# EAGLE board display_prog (EAGLE 6.1)
DATE: 01/14
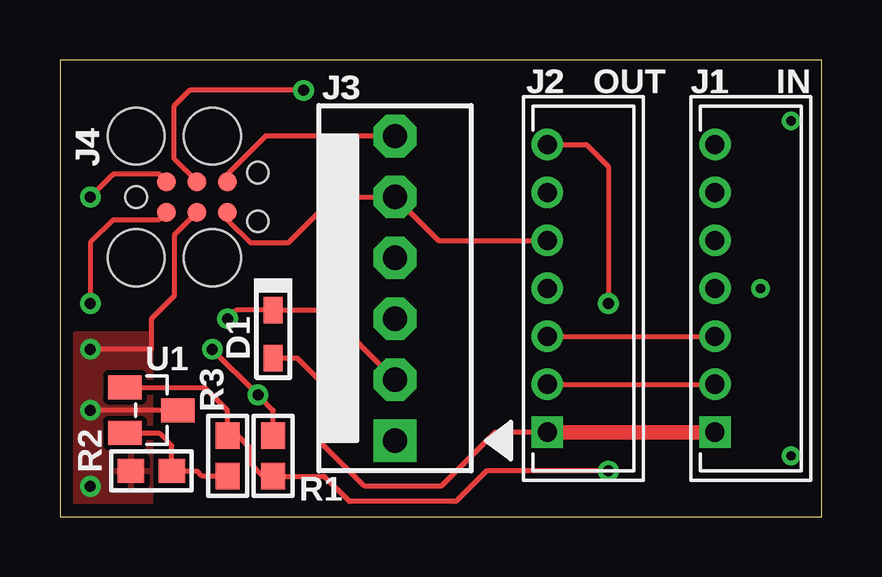
[diagram p0: board, top side]
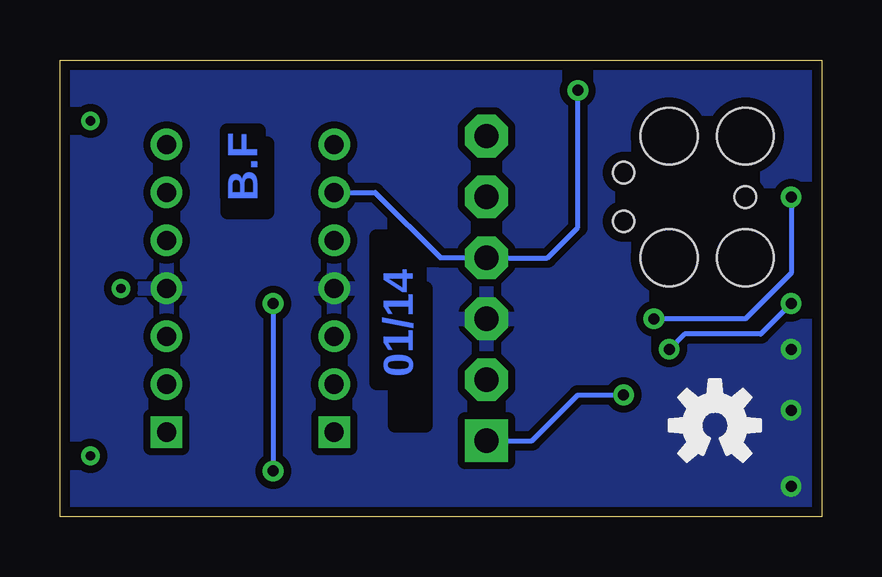
[diagram p1: board, bottom side, seen from below]

Size 31.75 x 19.05 mm. Coordinates in mm from the lower left corner, seen from the top.
Outline: 0,0 31.75,0 31.75,19.05 0,19.05 0,0
Copper layers (1*16): Top 0.035mm / dielectric 1.5mm / Bottom 0.035mm
Design rules: minimum track width 8mil, minimum drill 18mil, track to track 8mil, track to pad 8mil, pad to pad 8mil, via to via 8mil, smd to smd 8mil, copper to edge 16mil, drill to drill 8mil, minimum pad ring 10mil, minimum via ring 8mil, stop-mask expansion 4mil, vias tented up to drill 24mil, thermal gap 10mil
bRestrict: area 23.1,12.7 to 24.8,15.6; area 16.5,3.8 to 17.8,9.5

## Footprints (pad centres in the part's own frame; a part is rotated, then mirrored left to right if it is on the bottom)
DIODE_0603 = smd 1.1 x 0.8: A -1,0; K 1,0
DF3X-7P-2DSA = drill 0.8 square: 1 6,0 | drill 0.8: 2 4,0; 3 2,0; 4 0,0; 5 -2,0; 6 -4,0; 7 -6,0
22-23-2061 = drill 1.016 pad 1.778 square: 1 -6.35,0 | drill 1.016 pad 1.778 octagon: 2 -3.81,0; 3 -1.27,0; 4 1.27,0; 5 3.81,0; 6 6.35,0
TC2030-MCP = smd 0.787 x 0.787: 1 1.27,-0.635; 2 1.27,0.635; 3 2.54,-0.635; 4 2.54,0.635; 5 3.81,-0.635; 6 3.81,0.635 | hole 0.889: 0,0; 5.08,-1.016; 5.08,1.016 | hole 2.375: 0,2.54; 0,-2.54; 3.175,-2.54; 3.175,2.54
SMD_0603 = smd 1.1 x 1: 1 -0.85,0; 2 0.85,0
SOT23 = smd 1 x 1.4: 1 -0.95,-1.1; 2 0.95,-1.1; 3 0,1.1

## Placement (x,y rotation side)
D1  N/A  [DIODE_0603]  8.89,7.62 90 top
J1  SNG-2MM-HEADER-07-V  [DF3X-7P-2DSA]  27.3,9.53 270 top
J2  SNG-2MM-HEADER-07-V  [DF3X-7P-2DSA]  20.32,9.53 270 top
J3  SNG-100-HEADER-06-FL-V  [22-23-2061]  13.97,9.53 90 top
J4  TC2030-MCP  [TC2030-MCP]  3.17,13.34 0 top
R1  270  [SMD_0603]  8.89,2.54 90 top
R2  10k 1%  [SMD_0603]  3.81,1.91 0 top
R3  24k 1%  [SMD_0603]  6.99,2.54 90 top
U1  LM431BCM3  [SOT23]  3.81,4.45 270 top
U$1  [OPENHW_LOGO_150]  4.45,3.81 0 bottom
U$2  [INFO_AUTHOR]  24.13,14.61 270 bottom
U$3  [INFO_DATE]  17.02,5.84 90 bottom

## Library data of the parts
D1 = Passive; DESCRIPTION: {DESCRIPTION} - SMT 0603 - {VALUE}; PACKAGE: SMT 0603; SKU: {VALUE}
J1 J2 = Connectors; DESCRIPTION: {DESCRIPTION} - SMT Vertical; MFG: Hirose Electronic; SKU: DF3X-7P-2DSA
J3 = Connectors; DESCRIPTION: {DESCRIPTION} - Vertical; MFG: Molex; SKU: 22-23-2061
J4 = Connectors; BOM: 0; MFG: Tag-Connect
R1-R3 = Passive; DESCRIPTION: {DESCRIPTION} - SMT 0603 - {VALUE}; PACKAGE: SMT 0603
U1 = Passive; DESCRIPTION: {DESCRIPTION} - 1% tolerance; MFG: Texas Instruments; PRICE: 0.79; SKU: LM431BCM3/NOPBCT-ND; SUPPLIER: Digi-Key
U$1-U$3 = Symbols

## Nets
3.3V: D1.A J1.1 J2.1
GND: J1.4 J2.4 J3.3 J4.3 R2.1 U1.3
ICSP-CLK: J2.5 J3.5 J4.5
ICSP-DAT: J2.6 J3.4 J4.4
N$7: J3.1 J4.1 R1.2
N$8: R2.2 R3.1 U1.2
N$9: J2.7 R1.1 R3.2 U1.1
N$10: J3.6 J4.6
SCL: J1.3 J2.3
SDA: J1.2 J2.2
VDD_MON: D1.K J3.2 J4.2

## Tracks (layer width: path | path; a pad name or v marks a point on that pad's centre or on a via)
3.3V
  Top 0.203: D1.A 9.89,6.62 10.79,5.71 10.79,3.17 12.7,1.27 15.88,1.27 18.13,3.52 J2.1
  Top 0.61: J2.1 J1.1
GND  (via drill 0.46)
  Top 0.203: J4.3 4.76,11.75 4.76,9.21 3.81,8.26 3.81,6.99 v1.27,6.99 | U1.3 v1.27,4.45
  other vias: 1.27,1.27
  pour Bottom (isolate 0.305): 0,19.05 31.75,19.05 31.75,0 0,0
  pour Top: 3.81,0.64 3.81,7.62 0.64,7.62 0.64,0.64
ICSP-CLK
  Top 0.203: J4.5 6.99,12.38 7.94,11.43 9.53,11.43 11.43,13.34 J3.5 15.78,11.53 J2.5
ICSP-DAT  (via drill 0.46)
  Top 0.203: J4.4 4.76,14.92 4.76,17.14 5.4,17.78 v10.16,17.78
  Bottom 0.203: J2.6 18.61,13.53 15.88,10.79 J3.4 11.43,10.79 10.16,12.06 v10.16,17.78
N$1  (via drill 0.38)
  other vias: 30.48,2.54
N$2  (via drill 0.38)
  other vias: 29.21,9.53
N$3  (via drill 0.38)
  other vias: 30.48,16.51
N$7  (via drill 0.46)
  Top 0.203: J4.1 4.13,12.38 2.22,12.38 1.27,11.43 v1.27,8.89 | R1.2 8.89,4.45 v8.26,5.08 v6.35,6.99
  Bottom 0.203: v1.27,8.89 2.54,7.62 5.71,7.62 v6.35,6.99 | J3.1 12.06,3.17 10.16,5.08 v8.26,5.08
N$8
  Top 0.203: R3.1 5.93,1.69 5.71,1.91 R2.2 4.66,2.96 4.12,3.5 U1.2
N$9  (via drill 0.46)
  Top 0.203: J2.7 21.94,15.53 22.86,14.61 v22.86,8.89 | v22.86,1.91 17.78,1.91 16.51,0.64 12.06,0.64 11.01,1.69 R1.1 8.47,1.69 7.94,2.22 7.94,2.86 7.41,3.39 R3.2 6.99,4.45 6.04,5.39 U1.1
  Bottom 0.203: v22.86,8.89 v22.86,1.91
N$10
  Top 0.203: J3.6 8.57,15.88 6.99,14.29 J4.6
SCL
  Top 0.203: J2.3 J1.3
SDA
  Top 0.203: J2.2 J1.2
VDD_MON  (via drill 0.46)
  Top 0.203: J4.2 4.13,14.29 2.22,14.29 v1.27,13.34 | v6.99,8.26 7.35,8.62 D1.K 11.06,8.62 J3.2
  Bottom 0.203: v1.27,13.34 1.27,10.16 3.17,8.26 v6.99,8.26

## Text on the board
tPlace: OUT | IN
_tsilk: J2 | OUT | J1 | IN | J3 | J4 | D1 | U1 | R3 | R2 | R1